# Altium PCB PCB1.PcbDoc
Units mil, origin at the board's own origin, x right, y up, seen from the top; angles counter-clockwise.
Board outline 1707.5 x 1259.84 mil, 4 copper layers (Top Layer, GND, Sign, Bottom Layer), stack 74.06 mil thick; 63 components, 58 nets, 299 pads, 627 vias.
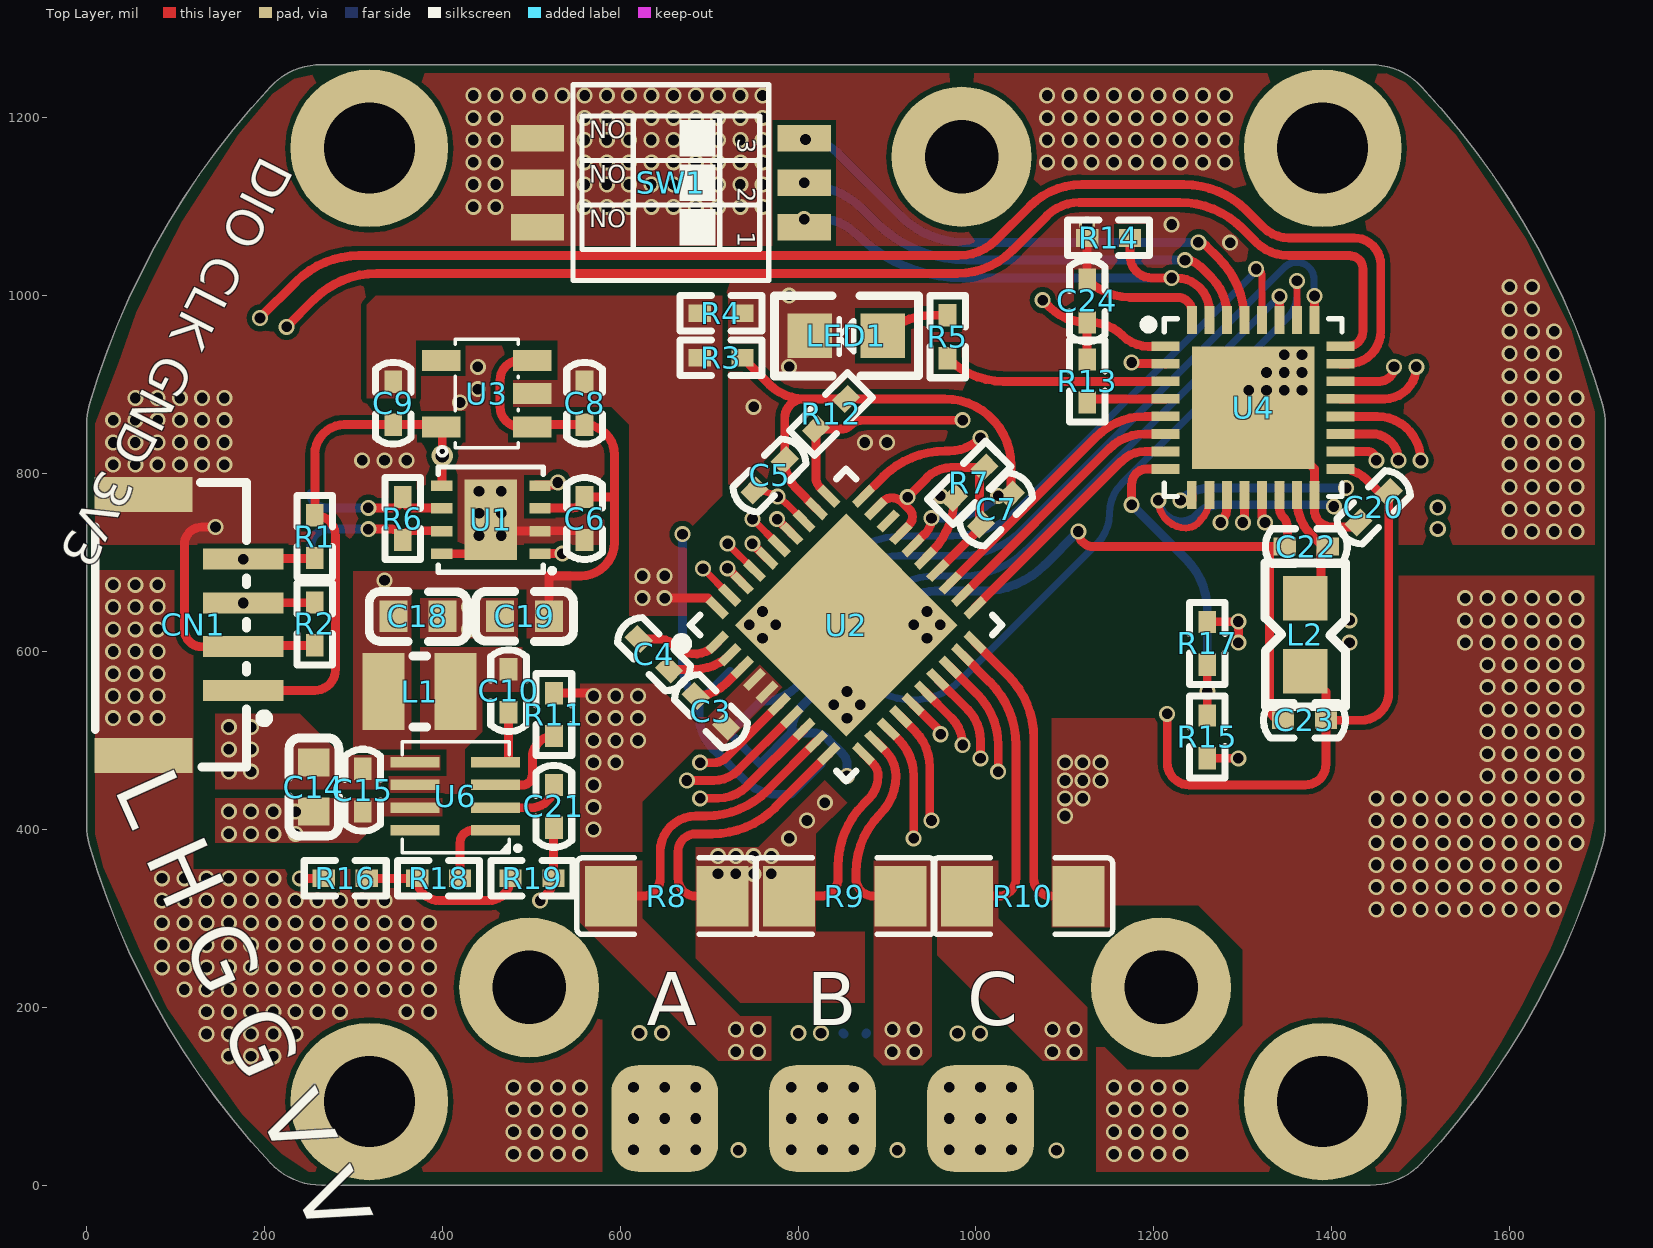
[diagram p0: Top Layer view]
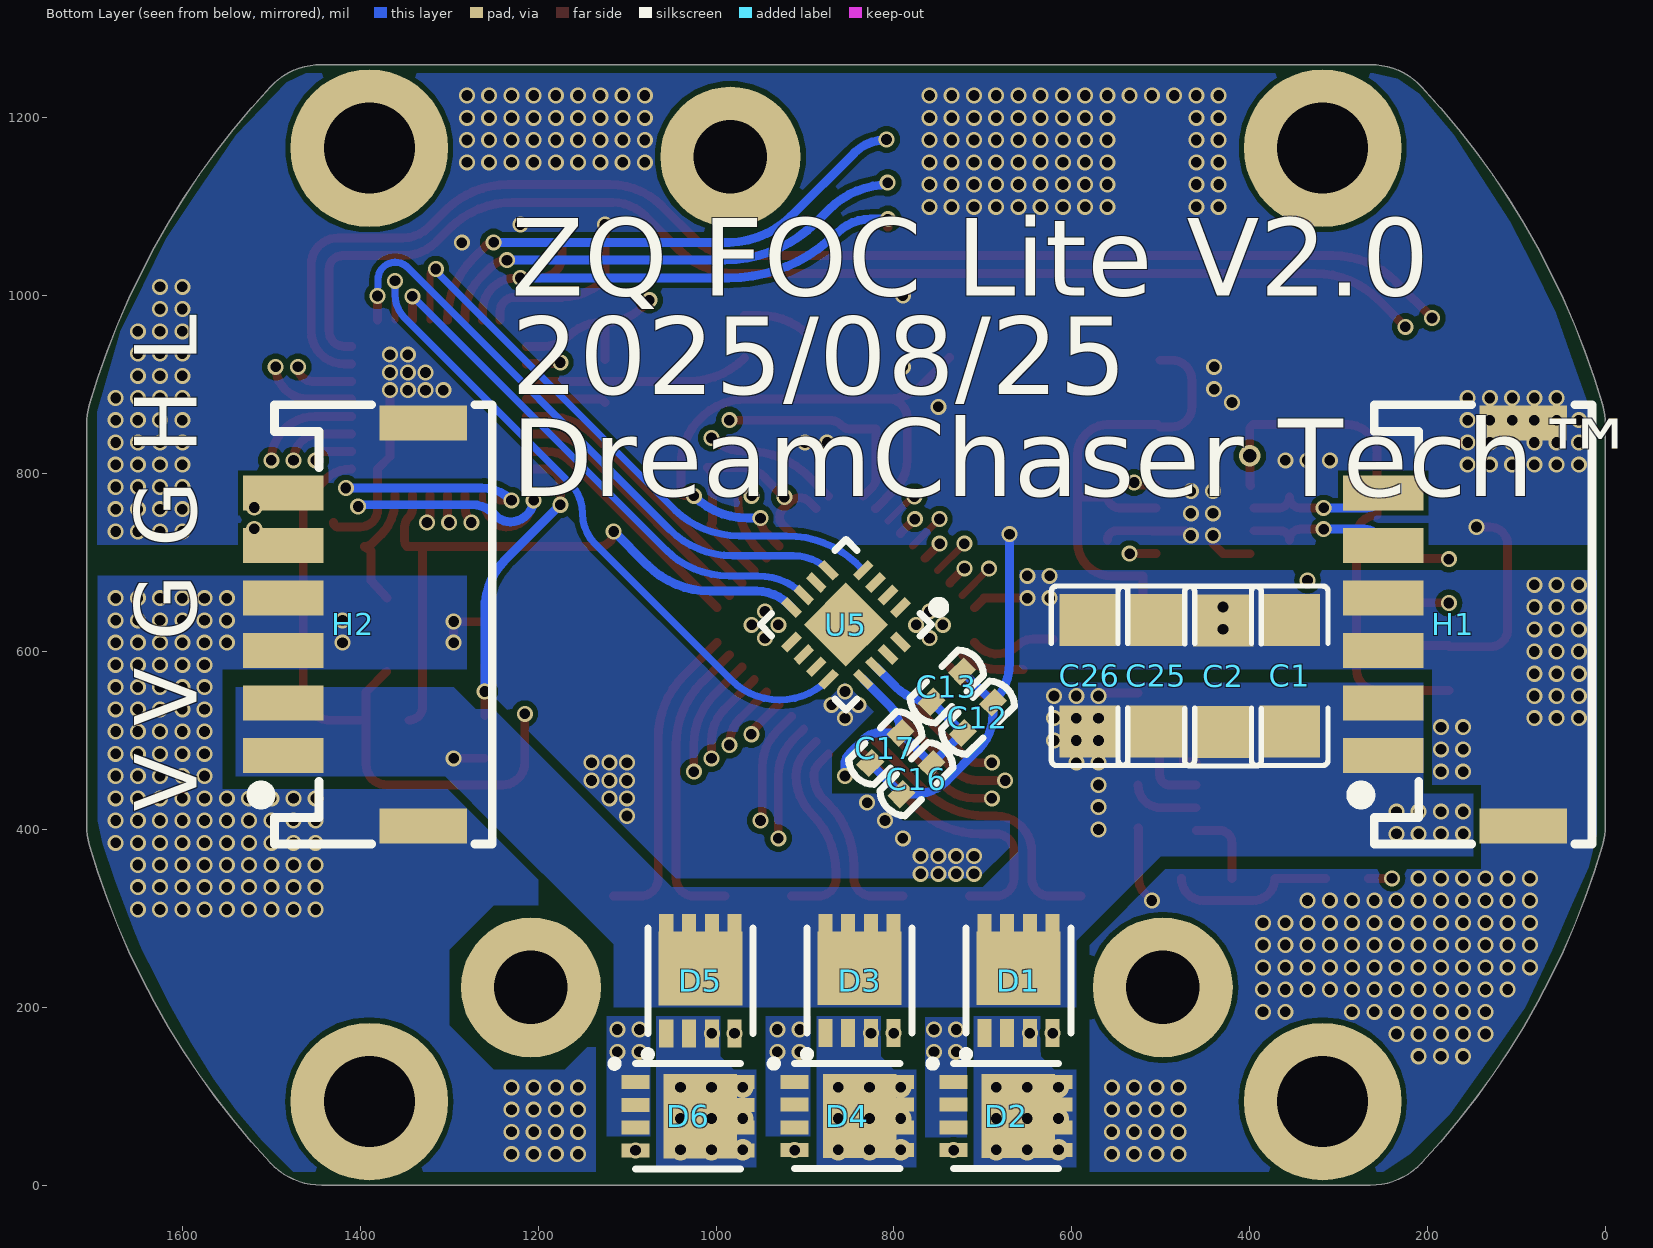
[diagram p1: Bottom Layer view, seen from below]
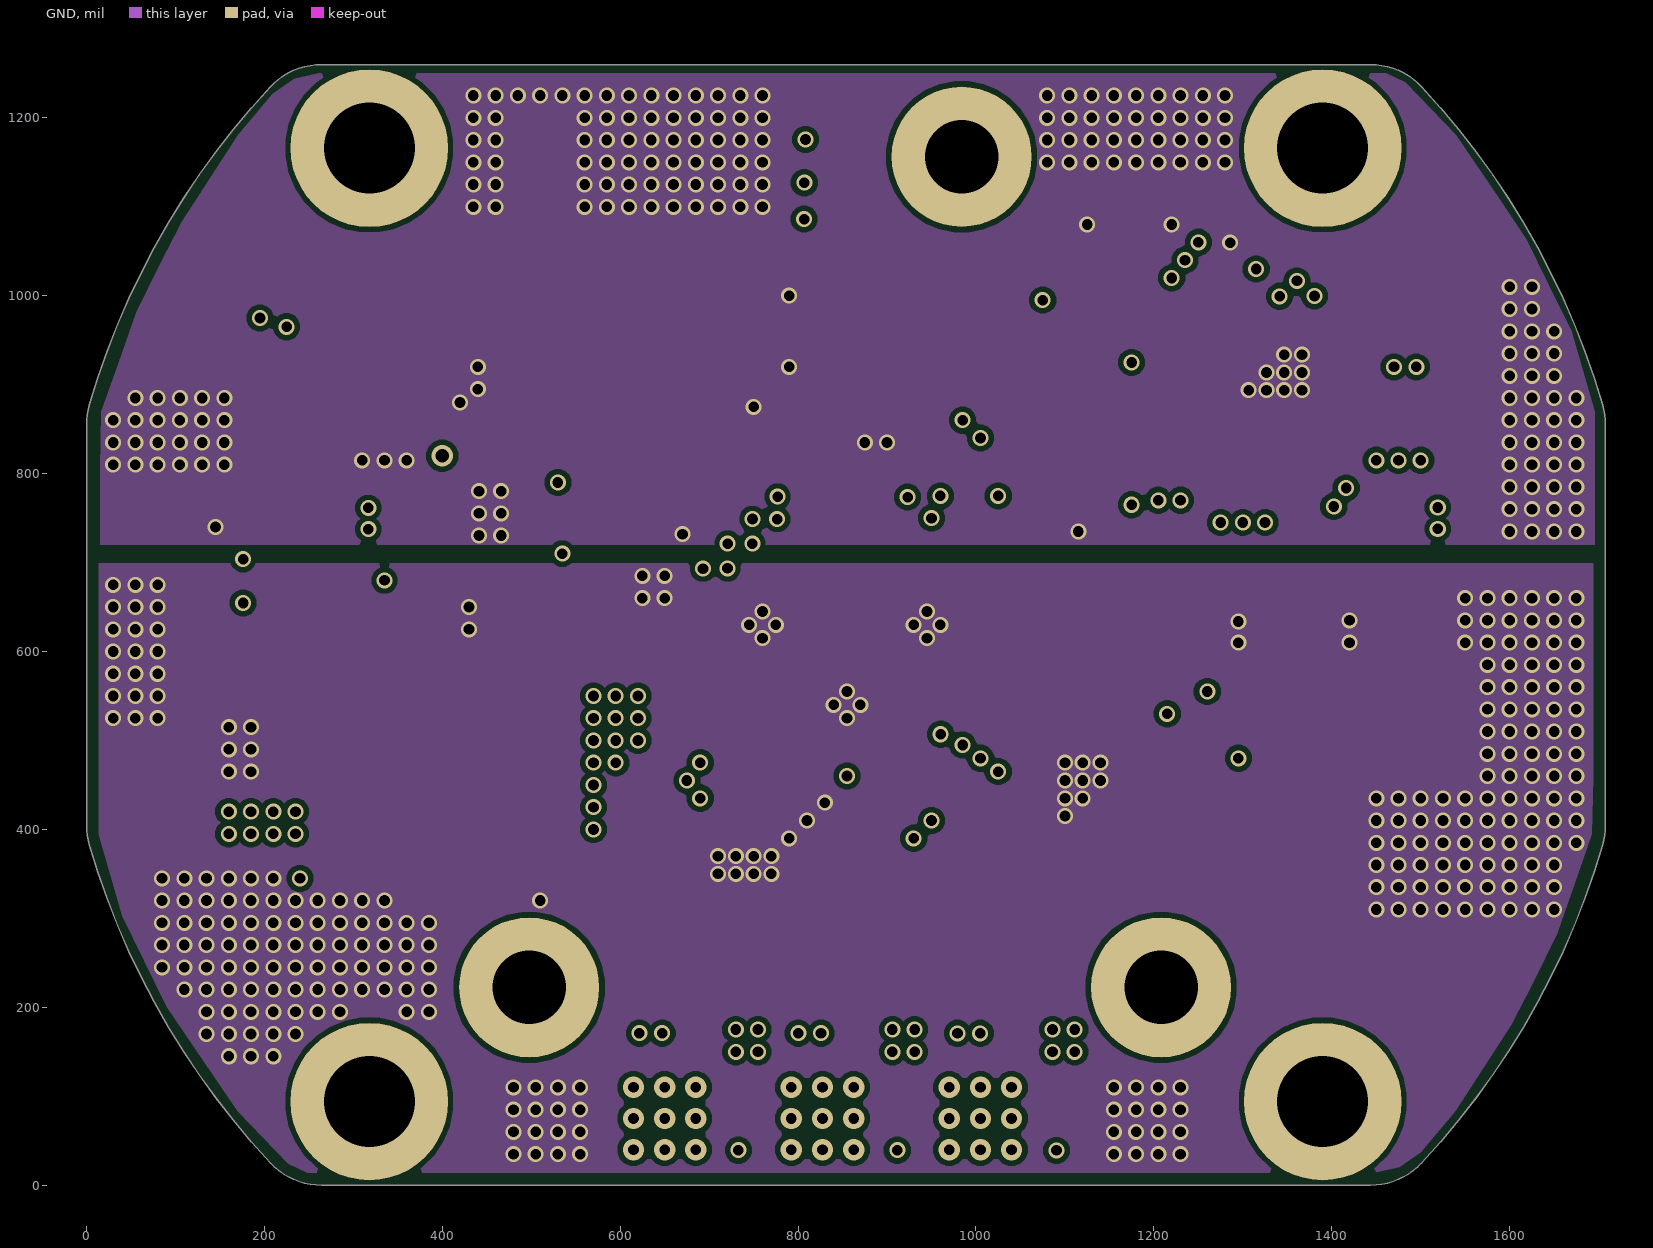
[diagram p2: GND]
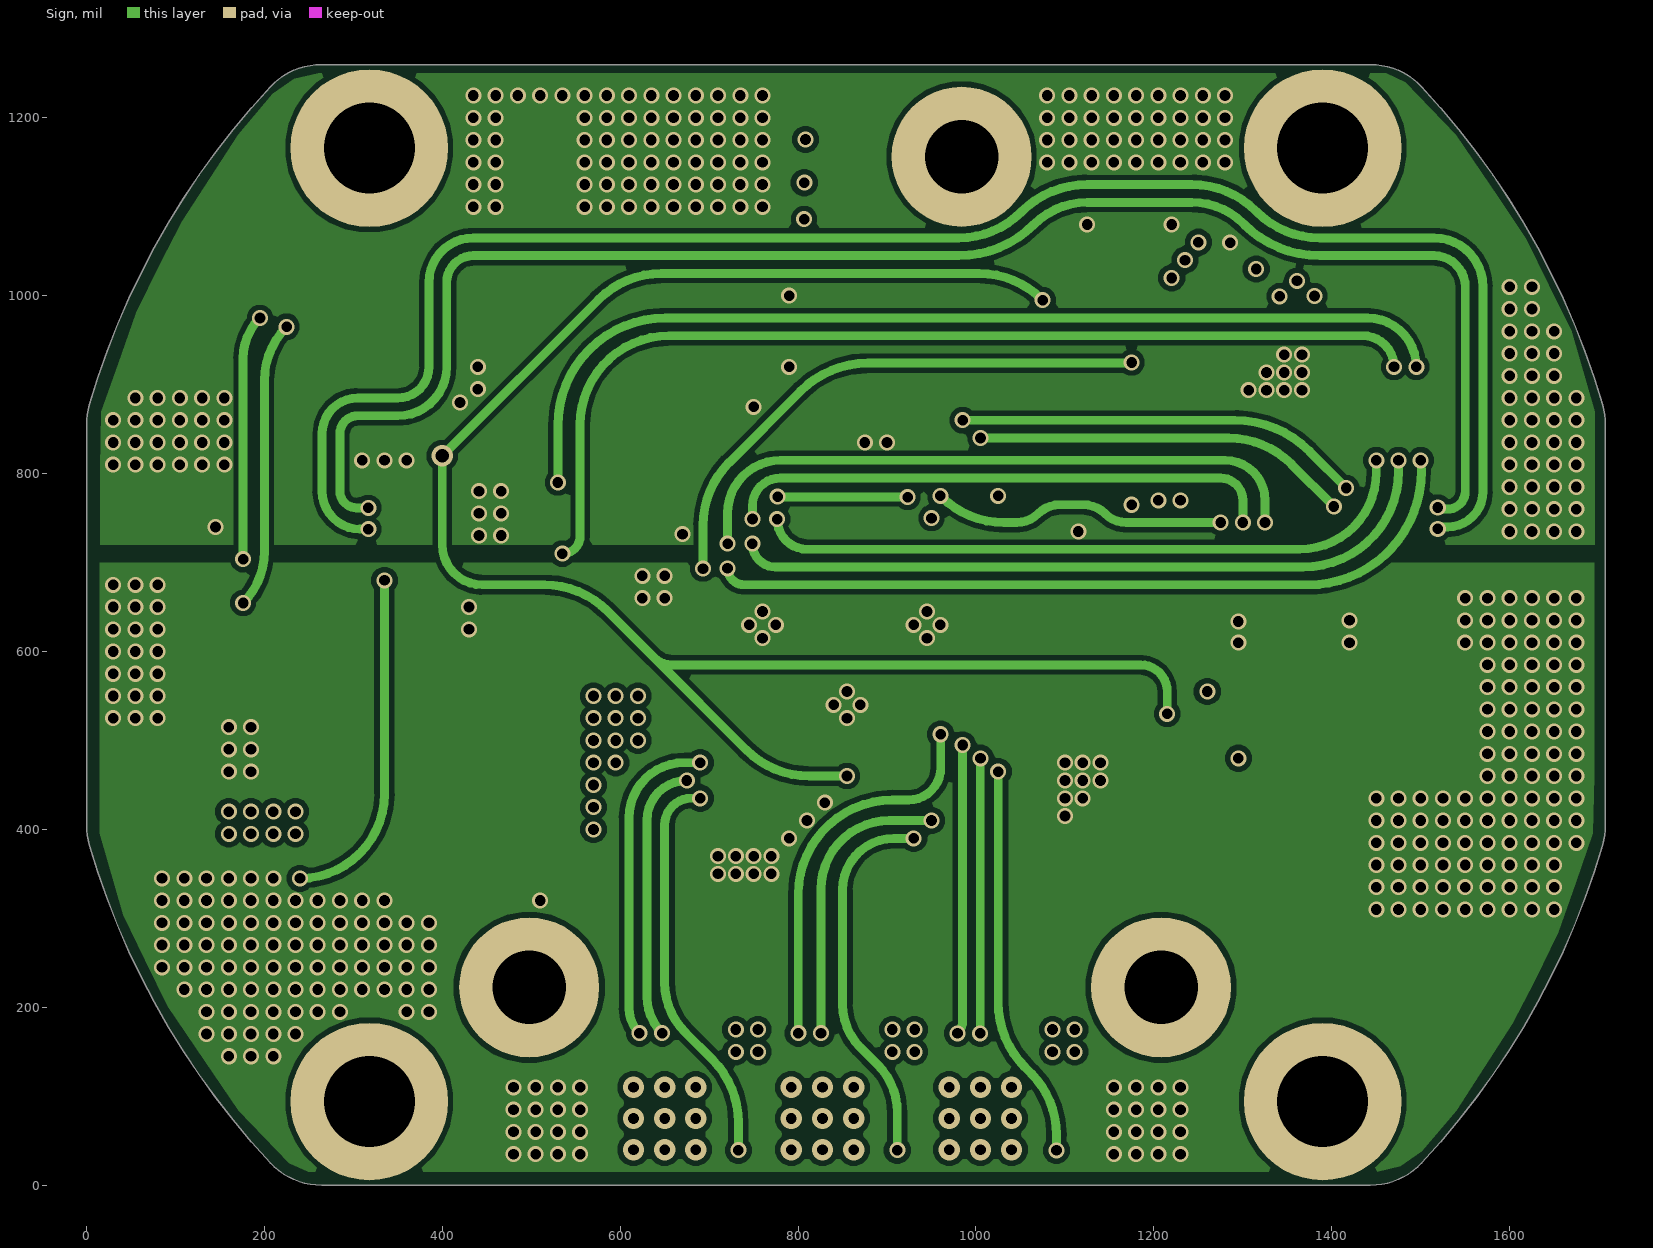
[diagram p3: Sign]
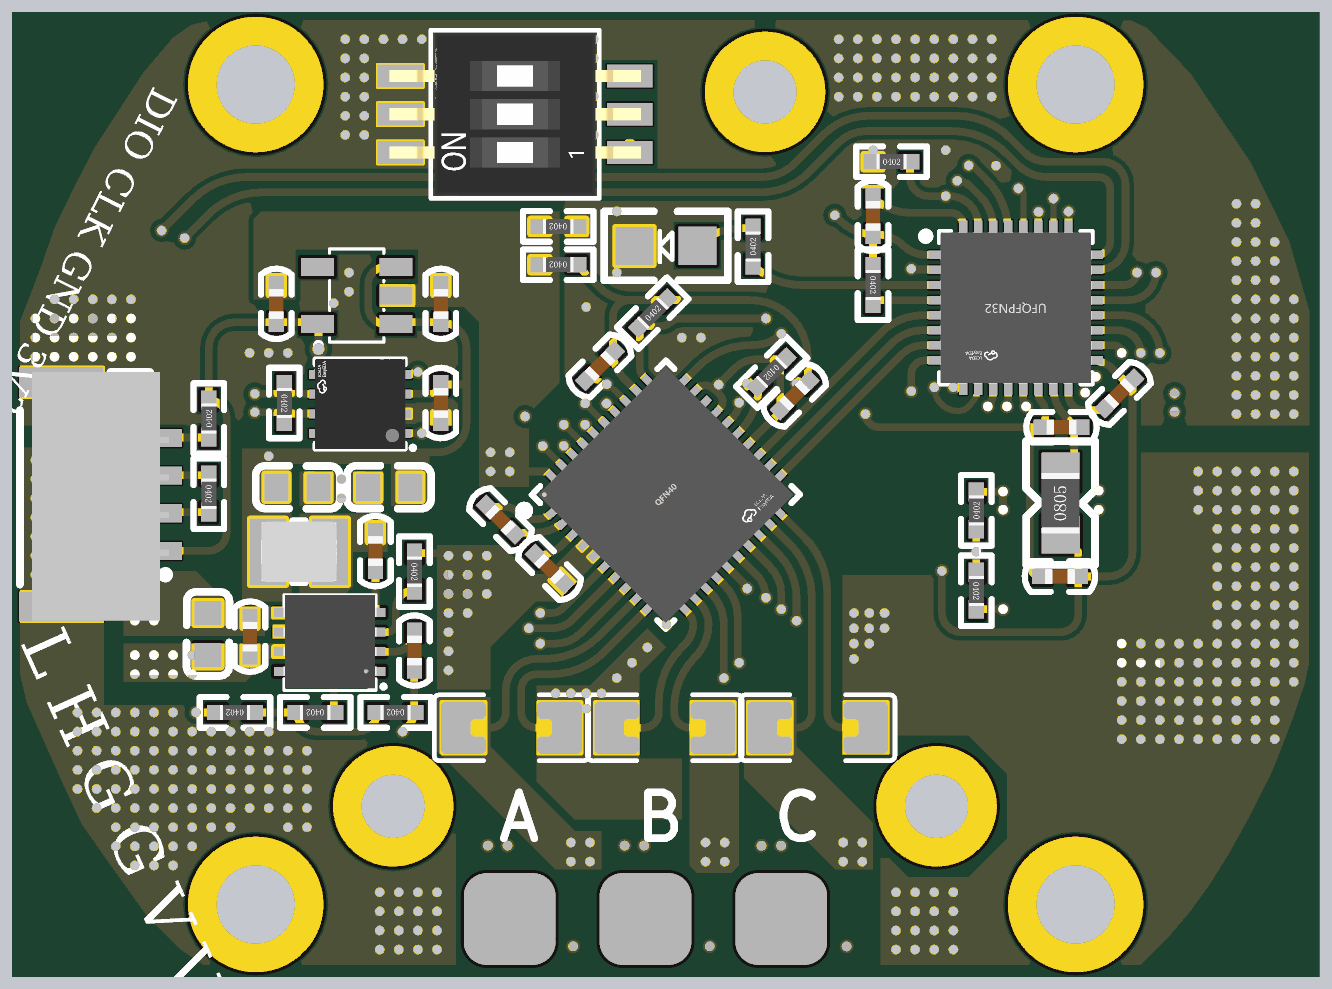
[diagram p4: 3D render of the assembled board from above, using the file's embedded part models]
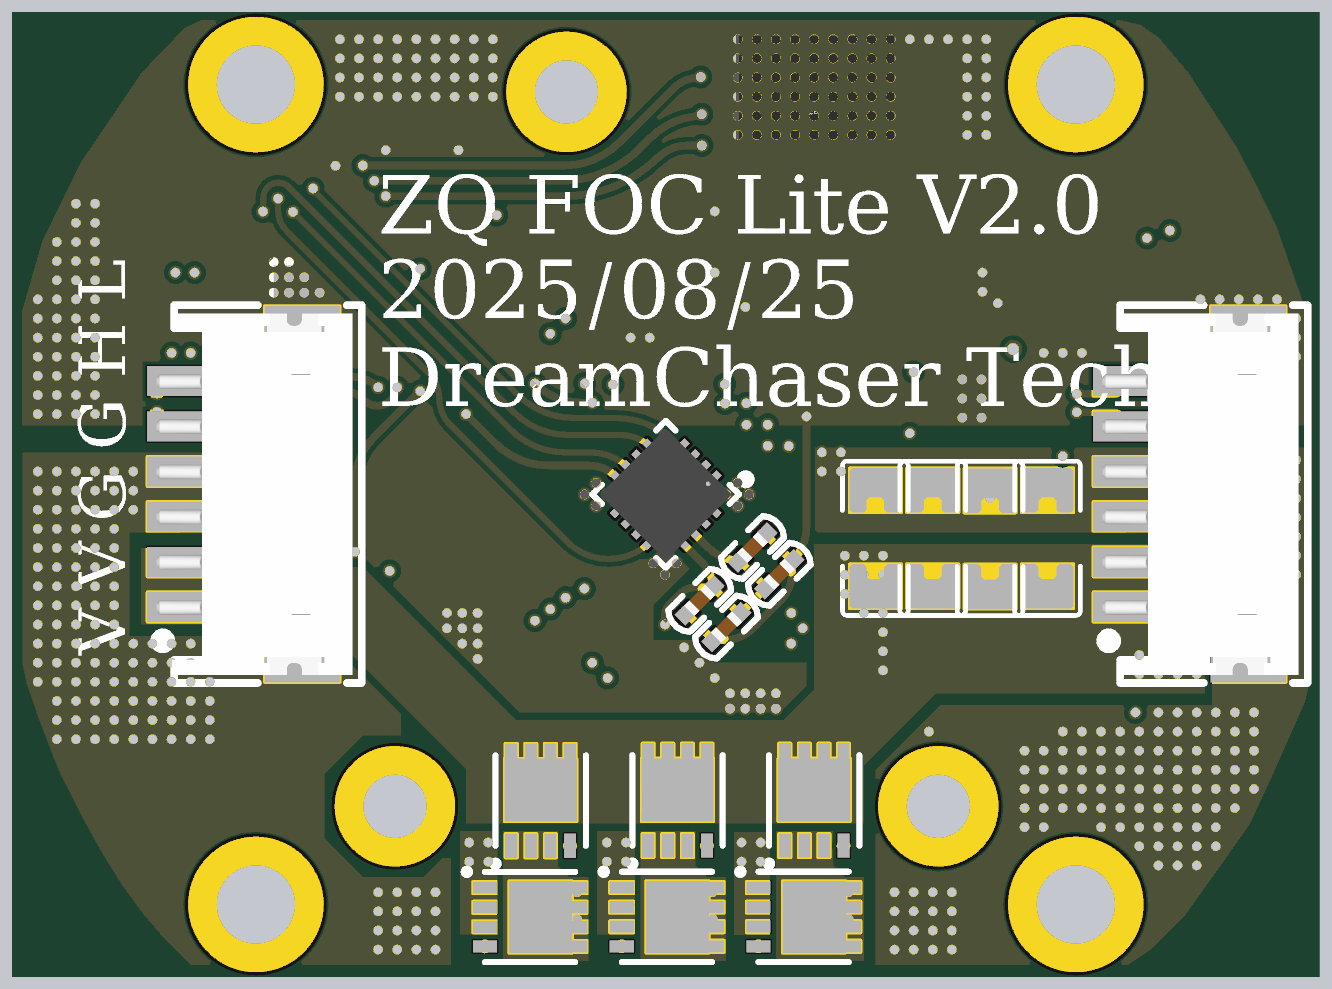
[diagram p5: 3D render of the assembled board from below, using the file's embedded part models]

## Layer stack, top to bottom
Top Solder: solder mask 0.4, Solder Resist, Dk 3.5
Top Layer: signal copper 1.4
Dielectric 2: prepreg 10.6299, PP-006, Dk 4.1
GND: signal copper 1.378
Dielectric 1: dielectric 47.244, FR-4, Dk 4.8
Sign: signal copper 1.378
Dielectric 3: prepreg 10.6299, PP-006, Dk 4.1
Bottom Layer: signal copper 1.4
Bottom Solder: solder mask 0.4, Solder Resist, Dk 3.5

## Board outline
206.79,24.97 cw(c853.88,629.92) 3.25,382.67 cw(c78.86,404.65) 0.12,404.65 0.13,855.2 cw(c78.87,855.2) 3.25,877.17 cw(c853.88,629.92) 206.79,1234.88 cw(c264.31,1181.1) 264.31,1259.84 1443.44,1259.84 cw(c1443.44,1181.1) 1500.96,1234.88 cw(c853.88,629.92) 1704.5,877.17 cw(c1628.89,855.2) 1707.62,855.2 1707.62,404.65 cw(c1628.89,404.65) 1704.5,382.67 cw(c853.88,629.92) 1500.96,24.97 cw(c1443.44,78.74) 1443.44,0 264.31,0 cw(c264.31,78.74)

## Design rules (kind name [scope] priority, off if disabled: settings)
Clearance [All] p1: gap=6 ignorepadtopadclearanceinfootprint=FALSE except(0: Arc-Hole Track-Hole SMDPad-Hole THPad-Hole Via-Hole Fill-Hole Poly-Hole Region-Hole Text-Hole)
DiffPairsRouting [All] p1: maxlimit=10 minlimit=10 mostfreqgap=10 toplayer_minwidth=8 toplayer_maxwidth=15 toplayer_prefwidth=10 midlayer1_minwidth=8 midlayer1_maxwidth=15 midlayer1_prefwidth=10 midlayer2_minwidth=8 midlayer2_maxwidth=15 midlayer2_prefwidth=10 bottomlayer_minwidth=8 bottomlayer_maxwidth=15 bottomlayer_prefwidth=10 maxuncoupledlength=500
HoleSize [All] p1: absolutevalues=TRUE maxlimit=10000 minlimit=1 maxpercent=80.000 minpercent=20.000
HoleToHoleClearance [All] p1: gap=0 allowstackedmicrovias=TRUE
MinimumSolderMaskSliver [All] p1: minsoldermaskwidth=0
PlaneClearance [All] p1: clearance=6
PlaneConnect [All] p1: planeconnectstyle=Direct reliefexpansion=20 reliefentries=4 reliefconductorwidth=10 reliefairgap=10
PolygonConnect [All] p1: connectstyle=Direct reliefconductorwidth=10 reliefentries=4 polygonreliefangle="90 Angle" airgapwidth=10
RoutingVias [All] p1: holewidth=12 width=18 viastyle="Through Hole" minholewidth=12 minwidth=18 maxholewidth=28 maxwidth=50
SilkToSilkClearance [All] p1: silktosilkclearance=0
SilkToSolderMaskClearance [IsPad] p1: minsilkscreentomaskgap=0 clearancetoexposedcopper=TRUE
SolderMaskExpansion [All] p1: expansion=4 istentingtop=FALSE
Width [All] p1: maxlimit=20 minlimit=6 preferedwidth=10
22 further rules are at their usual default settings.

## Classes and differential pairs
differential pair CAN: +CAN_P -CAN_N

## Components (designator, comment, footprint, x,y, rotation, side; value= is the part's Value field where it differs from the comment)
C1 "100uF" 1206 338.02,1163.63 r270 bottom
C2 "100uF" 1206 413.02,1163.23 r270 bottom
C3 "1uF" c0402 685,550 r315 top
C4 "47nF" c0402 620.92,614.08 r315 top
C5 "1uF" c0402 785,815 r225 top
C6 "0.1uF" c0402 560,725.41 r90 top
C7 "0.1uF" c0402 1039.58,776.72 r225 top
C8 "10uF" c0402 560,903.2 r270 top
C9 "10uF" c0402 345,903.2 r270 top
C10 "100nF" c0402 474.52,531.8 r90 top
C12 "1uF" C0402 722.57,508.57 r135 bottom
C13 "100nF" C0402 757.57,543.57 r135 bottom
C14 "10uF" C0603 167.57,1062.78 r270 top
C15 "100nF" c0402 310.52,468.2 r270 top
C16 "1uF" C0402 791.65,439.49 r135 bottom
C17 "100nF" C0402 826.65,474.49 r135 bottom
C18 "10uF" C0603 987.97,727.36 r180 top
C19 "10uF" C0603 -122.7,551.45 r0 top
C20 "0.1uF" c0402 1464.08,779.08 r225 top
C21 "100nF" c0402 525.52,401.8 r90 top
C22 "0.1uF" c0402 1347.23,717.99 r0 top
C23 "0.1uF" c0402 1345.2,522.7 r0 top
C24 "0.1uF" c0402 1125,970 r90 top
C25 "100uF" 1206 488.02,1163.63 r270 bottom
C26 "100uF" 1206 563.02,1163.63 r270 bottom
CN1 "卧式STLINK" CONN-SMD_4P-P1.25_GH1.25-4P 120,630 r270 top
D1 "NTMFS5C410NL" DFN-8_L3.0-W3.0-P0.65-BL 660,230 r180 bottom
D2 "NTMFS5C410NL" DFN-8_L3.0-W3.0-P0.65-BL 673.82,77.72 r270 bottom
D3 "NTMFS5C410NL" DFN-8_L3.0-W3.0-P0.65-BL 838.62,230 r180 bottom
D4 "NTMFS5C410NL" DFN-8_L3.0-W3.0-P0.65-BL 852.44,77.72 r270 bottom
D5 "NTMFS5C410NL" DFN-8_L3.0-W3.0-P0.65-BL 1017.56,229.84 r180 bottom
D6 "NTMFS5C410NL" DFN-8_L3.0-W3.0-P0.65-BL 1031.38,77.56 r270 bottom
H1 "卧式XH1.5 6PIN" CONN-SMD_6P-P1.50_ZX-ZH1.5-6PWT 155,630 r90 bottom
H2 "卧式XH1.5 6PIN" CONN-SMD_6P-P1.50_ZX-ZH1.5-6PWT 1391.54,630 r90 bottom
L1 "22uH" IND-SMD_L2.5-W2.0 374.52,555 r0 top value=10uH
L2 "10μH" L0805 1370.2,577.7 r90 top
LED1 "LED" led0805 895.43,955 r180 top
R1 "10KΩ" R0402 256.7,705.11 r90 top
R2 "10KΩ" R0402 256.7,655.11 r270 top
R3 "0Ω" R0402 737.62,930.31 r180 top
R4 "0Ω" R0402 737.62,980.31 r180 top
R5 "2KΩ" R0402 968.12,929.8 r90 top
R6 "120Ω" R0402 355.46,773.61 r270 top
R7 "10KΩ" R0402 1009.58,806.72 r225 top
R8 "30mR" 1206 1243.23,308.02 r180 top
R9 "30mR" 1206 261.77,341.98 r0 top
R10 "30mR" 1206 1643.63,308.02 r180 top
R11 "10KΩ" R0402 525.52,553.2 r270 top
R12 "200KΩ" R0402 820,850 r45 top
R13 "10KΩ" R0402 1125,928.2 r270 top
R14 "200KΩ" R0402 1125,1065 r0 top
R15 "10KΩ" R0402 1260,528.2 r270 top
R16 "43KΩ" R0402 315,345 r180 top
R17 "1KΩ" R0402 1260,585 r90 top
R18 "51KΩ" R0402 420,345 r180 top
R19 "8.2KΩ" R0402 525,345 r180 top
SW1 "DSHP03TSGER" SW-SMD_6P-L5.4-W5.4-P1.27-LS8.4 657,1127 r90 top
U1 "SIT1057QTK/3" DFN-8_L3.0-W3.0-P0.65-BL-EP 454.53,748.24 r90 top
U2 "DRV8323HRTAR" QFN-40_L6.0-W6.0-P0.50-BL-EP4.5 854.07,629.73 r315 top locked
U3 "XC6201P332MR-HXY" SOT-23-5_L3.0-W1.7-P0.95-LS2.8-BR 450,890 r0 top
U4 "STM32G431KBU3" UFQFPN-32_L5.0-W5.0-P0.50-BL-EP3.5 1311.58,874.21 r270 top
U5 "MA600" qfn-16-l3.0-w3.0-p0.50-tl-ep1.7 853.96,630.15 r315 bottom locked
U6 "MP9943" "QFN-8 3x3" 460.07,398.82 r180 top

## Footprints (in the part's own frame and the unit in brackets; to place one, negate y for a bottom-side part, rotate by r counter-clockwise, add the part's x,y. Pads: shape width x height; smd on the part's side, far side on the other; paste and mask are expansions set on the pad)
1206 [mm]
  rect 1.485x1.728 smd paste-100 mask+0.051: 1(13.417,-0.431) 2(16.602,-0.431)
  silkscreen extent 12.45,-1.52 17.57,0.66, body extent 13.41,-1.24 16.61,0.38, height 1.11
c0402 [mil]
  rect 25x20 smd: 1(0,0) 2(48.2,0)
  silkscreen extent -22,-20 70,20, body extent 5,-10 44,10, height 20
C0402 [mil]
  rect 25x20 smd: 1(0,0) 2(48.2,0)
  silkscreen extent -22,-20 70,20, body extent 5,-10 44,10, height 20
C0603 [mm]
  rect 0.8x0.9 smd: 1(14.93,2.234) 2(16.33,2.234)
  silkscreen extent 14.22,1.52 17.02,2.95, body extent 14.82,1.84 16.42,2.64, height 0.78
CONN-SMD_4P-P1.25_GH1.25-4P [mm]
  rect 0.6x2.3 smd mask+0.051: 1(1.875,1.425) 2(0.625,1.425) 3(-0.625,1.425) 4(-1.875,1.425)
  rect 1x2.8 smd mask+0.051: 5(-3.725,-1.425) 6(3.725,-1.425)
  silkscreen extent -4.06,-2.8 4.06,2.16, body extent -4.07,-2.4 4.19,2.15, height 4.13
CONN-SMD_6P-P1.50_ZX-ZH1.5-6PWT [mm]
  rect 1x2.3 smd paste+0 mask+0.05: 1(-3.738,2.413) 2(-2.238,2.413) 3(-0.738,2.413) 4(0.762,2.413) 5(2.262,2.413) 6(3.762,2.413)
  rect 1x2.5 smd paste+0 mask+0.05: 7(5.762,-1.587) 8(-5.738,-1.587)
  silkscreen extent -6.26,-3.56 6.28,3.46, body extent -6,-3.25 6.01,3.25, height 3.78
DFN-8_L3.0-W3.0-P0.65-BL [mm]
  rect 0.4x0.8 smd paste-100 mask+0.051: D(-0.975,1.5) D(-0.325,1.5) D(0.325,1.5) D(0.975,1.5) G(0.975,-1.5) S(-0.975,-1.5) S(-0.325,-1.5) S(0.325,-1.5)
  rect 2.4x2.1 smd paste-100 mask+0.051: D(0,0.35)
  silkscreen extent -1.6,-2.2 1.5,1.5, body extent -1.55,-1.6 1.55,1.6, height 0.8
DFN-8_L3.0-W3.0-P0.65-BL-EP [mm]
  rect 0.3x0.6 smd paste+0 mask+0.05: 1(-0.975,-1.4) 2(-0.325,-1.4) 3(0.325,-1.4) 4(0.975,-1.4) 5(0.975,1.4) 6(0.325,1.4) 7(-0.325,1.4) 8(-0.975,1.4)
  rect 2.3x1.5 smd paste+0 mask+0.05: 9(0,0)
  silkscreen extent -1.51,-1.8 1.5,1.5, body extent -1.5,-1.5 1.5,1.5, height 1.01
IND-SMD_L2.5-W2.0 [mm]
  rect 1.2x2.2 smd: 1(1.028,0) 2(-1.028,0)
  silkscreen extent -0.2,-1.02 0.2,1.02, body extent -1.26,-1 1.26,1, height 1.2
L0805 [mil]
  rect 50x50 smd: 1(0,0) 2(82.3,0.2)
  silkscreen extent -40,-45 122,45, body extent 1,-24 80,25, height 22
led0805 [mil] "1/8W"
  rect 50x50 smd: 1(0,0) 2(82.3,0.2)
  silkscreen extent -40,-45 122,45, body extent 2,-25 80,25, height 20
"QFN-8 3x3" [mm]
  rect 1.4x0.3 smd: 1(0,0) 2(0,-0.65) 3(0,-1.3) 4(0,-1.95) 5(2.3,-1.95) 6(2.3,-1.3) 7(2.3,-0.65) 8(2.3,0)
  silkscreen extent -0.64,-2.54 2.67,0.64, body extent -0.41,-2.53 2.69,0.57, height 0.94
qfn-16-l3.0-w3.0-p0.50-tl-ep1.7 [mm]
  rect 0.6x0.25 smd: 1(-1.45,0.75) 2(-1.45,0.25) 3(-1.45,-0.25) 4(-1.45,-0.75) 9(1.45,-0.75) 10(1.45,-0.25) 11(1.45,0.25) 12(1.45,0.75)
  rect 0.25x0.6 smd: 5(-0.75,-1.45) 6(-0.25,-1.45) 7(0.25,-1.45) 8(0.75,-1.45) 13(0.75,1.45) 14(0.25,1.45) 15(-0.25,1.45) 16(-0.75,1.45)
  rect 1.7x1.7 smd: 17(0,0)
  silkscreen extent -2.38,-1.72 1.72,1.72, body extent -1.55,-1.55 1.55,1.55, height 0.94
QFN-40_L6.0-W6.0-P0.50-BL-EP4.5 [mm]
  rect 0.25x0.7 smd paste-100 mask+0.051: 1(-2.25,-2.95) 2(-1.75,-2.95) 3(-1.25,-2.95) 4(-0.75,-2.95) 5(-0.25,-2.95) 6(0.25,-2.95) 7(0.75,-2.95) 8(1.25,-2.95) 9(1.75,-2.95) 10(2.25,-2.95) 21(2.25,2.95) 22(1.75,2.95) 23(1.25,2.95) 24(0.75,2.95) 25(0.25,2.95) 26(-0.25,2.95) 27(-0.75,2.95) 28(-1.25,2.95) 29(-1.75,2.95) 30(-2.25,2.95)
  rect 0.7x0.25 smd paste-100 mask+0.051: 11(2.95,-2.25) 12(2.95,-1.75) 13(2.95,-1.25) 14(2.95,-0.75) 15(2.95,-0.25) 16(2.95,0.25) 17(2.95,0.75) 18(2.95,1.25) 19(2.95,1.75) 20(2.95,2.25) 31(-2.95,2.25) 32(-2.95,1.75) 33(-2.95,1.25) 34(-2.95,0.75) 35(-2.95,0.25) 36(-2.95,-0.25) 37(-2.95,-0.75) 38(-2.95,-1.25) 39(-2.95,-1.75) 40(-2.95,-2.25)
  rect 4.5x4.5 smd paste-100 mask+0.051: 41(0,0)
  silkscreen extent -3.15,-3.85 3.15,3.15, body extent -3.01,-3.01 3.01,3.01, height 0.83
R0402 [mil] "1/16W"
  rect 25x20 smd: 1(0,0) 2(48.2,0)
  silkscreen extent -22,-20 70,20, body extent 5,-10 44,10, height 14
SOT-23-5_L3.0-W1.7-P0.95-LS2.8-BR [mm]
  rect 1.1x0.6 smd: 1(1.3,-0.95) 2(1.3,0) 3(1.3,0.95) 4(-1.3,0.95) 5(-1.3,-0.95)
  silkscreen extent -1.4,-1.78 0.9,1.55, body extent -1.5,-1.5 1.5,1.5, height 1.3
SW-SMD_6P-L5.4-W5.4-P1.27-LS8.4 [mil]
  rect 30x60 smd paste+0 mask+2: 1(-50,-150) 2(0,-150) 3(50,-150) 4(50,150) 5(0,150) 6(-50,150)
  silkscreen extent -110,-110 110,110, body extent -106,-164 106,164, height 91
UFQFPN-32_L5.0-W5.0-P0.50-BL-EP3.5 [mm]
  rect 0.28x0.8 smd paste-100 mask+0.051: 1(-1.75,-2.5) 2(-1.25,-2.5) 3(-0.75,-2.5) 4(-0.25,-2.5) 5(0.25,-2.5) 6(0.75,-2.5) 7(1.25,-2.5) 8(1.75,-2.5) 17(1.75,2.5) 18(1.25,2.5) 19(0.75,2.5) 20(0.25,2.5) 21(-0.25,2.5) 22(-0.75,2.5) 23(-1.25,2.5) 24(-1.75,2.5)
  rect 0.8x0.28 smd paste-100 mask+0.051: 9(2.5,-1.75) 10(2.5,-1.25) 11(2.5,-0.75) 12(2.5,-0.25) 13(2.5,0.25) 14(2.5,0.75) 15(2.5,1.25) 16(2.5,1.75) 25(-2.5,1.75) 26(-2.5,1.25) 27(-2.5,0.75) 28(-2.5,0.25) 29(-2.5,-0.25) 30(-2.5,-0.75) 31(-2.5,-1.25) 32(-2.5,-1.75)
  rect 3.5x3.5 smd paste-100 mask+0.051: 33(0,0)
  silkscreen extent -2.54,-3.12 2.54,2.54, body extent -2.51,-2.52 2.52,2.51, height 0.61

## Part data
C1 C2 C14 C18 C19 C25 C26: library part 1210贴片电容, "1210贴片电容"
C3 C4 C5 C6 C7 C8 C9 C10 C12 C13 C15 C16 C17 C20 C21 C22 C23 C24: library part 0402贴片电容, "贴片电容0402"
D1 D2 D3 D4 D5 D6: "N沟道MOS管", ComponentLink1Description="Manufacturer Link", ComponentLink1URL=http://www.irf.com/, DatasheetVersion=PD-9.814, LatestRevisionDate=17-Jul-2002, LatestRevisionNote="Re-released for DXP Platform.", Note="Pin 2 is electrically connected to pin 4.", PackageDescription="TO, Thru-Hole, Vertical, Heatsink Mounted; 3 In-Line Leads; Pitch 2.54 mm", PackageReference=TO-220AB, PackageVersion=Feb-1997, Published=8-Jun-2000, Publisher="Altium Limited"
L1: library part 0530屏蔽电感, "一体成型屏蔽电感，0530封装，额定电流3A", DC Resistance (DCR)=125mΩ, JLCPCB Part Class="Extended Part", LCSC Part Name="10uH ±20% 3.5A", Manufacturer=XR(祥如), Manufacturer Part=XR0530-100M, Rated Current=3.2A, Saturation Current (Isat)=3.5A, Tolerance=±20%, Add into BOM=yes, Convert to PCB=yes, Datasheet=https://atta.szlcsc.com/upload/public/pdf/source/20240328/42FE63A3232C4AF7EB8F1CDEDD5FC69F.pdf, Device=XR0530-100M, Supplier=LCSC, Supplier Footprint=SMD,0530, Supplier Part=C5307602, Symbol=XR0530-100M, Type=一体成型电感
L2: library part 0805贴片电感, "0805贴片电感"
LED1: library part 0805贴片LED, "0805贴片LED"
R1 R2 R3 R4 R5 R6 R7 R11 R12 R13 R14 R15 R16 R17 R18 R19: library part 0402贴片电阻, "0402贴片电阻"
R8 R9 R10: library part 2512检流电阻, "2512检流电阻"
U2: JLCPCB Part Class="Extended Part", LCSC Part Name="5mA 无刷直流BLDC电机驱动芯片 60V", Manufacturer=TI(德州仪器), Add into BOM=yes, Convert to PCB=yes, Datasheet=https://www.ti.com/cn/lit/gpn/drv8323, Device=DRV8323HRTAR, Manufacturer Part=DRV8323HRTAR, Supplier=LCSC, Supplier Footprint=QFN-40-EP(6x6), Supplier Part=C701783, Symbol=DRV8323HRTAR
U3: "3.3V LDO", JLCPCB Part Class="Extended Part", Manufacturer="HXY MOSFET(华轩阳电子)", MAX Output Current=300mA, Maximum Input Voltage=12V, Output Voltage=3.3V, Add into BOM=yes, Convert to PCB=yes, Datasheet=https://atta.szlcsc.com/upload/public/pdf/source/20231208/3D7EFECB06481ED5AED4680614D7FFF5.pdf, Device=XC6201P332MR-HXY, LCSC Part Name=XC6201P332MR-HXY, Manufacturer Part=XC6201P332MR-HXY, Output Polarity=正极, Output Type=固定, Supplier=LCSC, Supplier Footprint=SOT-23-5L, Supplier Part=C19626990, Symbol=XC6201P332MR-HXY
U4: JLCPCB Part Class="Extended Part", LCSC Part Name="带DSP和FPU的170MHz主流ARM Cortex-M4 MCU，具有128 KB Flash存储器、数学加速器和中等模拟电平集成", Low Voltage Detection Threshold=1.71V~3.6V, Manufacturer=ST(意法半导体), ADC (Bit)=12bit, Add into BOM=yes, Application Area=-, Convert to PCB=yes, CPU Core=ARM-M4, CPU Maximum Speed=170MHz, DAC (Bit)=12bit, Datasheet=https://atta.szlcsc.com/upload/public/pdf/source/20210607/F3CD0646E5D00AAFDE875C196C2D7333.pdf, Device=STM32G431KBU3, Manufacturer Part=STM32G431KBU3, Number of I/O=26, Program Memory Type=FLASH, Program Storage Size=128KB, Supplier=LCSC, Supplier Footprint=UFQFPN-32(5x5), Supplier Part=C1341901, Symbol=STM32G431KBU3
U5: "磁编码器"

## Free pads (board coordinates)
  round 157.48 hole 82.68: 7(497.73,222.37) 8(1208.03,222.37) 9(983.84,1156.18)
  round 177.17 hole 102.36: 10(317.98,1165.82) 11(1389.77,1165.82) 12(317.98,94.02) 13(1389.77,94.02)
  rrect50% 120x120 smd: 14(650,75) 14(827.5,75) 14(1005,75)

## Via types
v1: diameter 18, hole 12, Top Layer to Bottom Layer, tented both sides, 599 vias
v2: diameter 24, hole 12, Top Layer to Bottom Layer, tented both sides, 27 vias
v3: diameter 24, hole 15, Top Layer to Bottom Layer, tented both sides, 1 vias

## Nets (pads, with @x,y where several pads share a name; then routed paths per layer and width w, separated by ;. In a path a pad name is that pad's centre, name@x,y a point inside that pad or via, vN(x,y) a via of type N, cw(c..) or ccw(c..) an arc to the next point about the centre after c; other vN are vias at no path point)
3V3: C9.2 C12.1 C13.1 C16.2 C17.2 C20.1 C23.2 C24.1 CN1.1 L2.1 R1.2 R13.1 U1.5 U3.5 U4.1 U4.17 U5.13 U5.14 | length 3992.2
  Top Layer w10: CN1.1 256.18,556.18 ccw(c256.18,580) 280,580 280,730.02 ccw(c256.7,730.02) R1.2 256.7,821.7 cw(c290,821.7) 290,855 396.42,855 400,851.42 v3(400,820) 399.71,819.71 399.71,787.24 U1.5@399.09,786.63 ; v1(1075,995) 1082.32,987.68 ccw(c1125,1030.36) C24.1 ; R13.1 C24.1 ; U4.1 1193.68,943.12 cw(c1193.68,983.68) 1165,955 ccw(c1128.79,918.79) 1128.79,970 C24.1 ; v1(1215,530) 1215,475 ccw(c1240,475) 1240,450 1370,450 ccw(c1370,473.4) 1393.4,473.4 C23.2 ; L2.1 1393.4,554.5 C23.2 ; U4.17 cw(c1410,763.97) 1439.24,793.21 1458.46,773.99 C20.1@1463.56,779.08 ; C20.1@1463.82,779.34 C20.1@1463.56,779.08 ; C23.2 1432.7,522.7 ccw(c1432.7,554.08) 1464.08,554.08 C20.1 C20.1@1463.56,779.08
  Sign w10: v1(855,460) 812.56,460 cw(c812.56,560) 741.85,489.29 638.09,593.05 ; v1(1075,995) 1074.29,995.71 ccw(c1003.58,925) 1003.58,1025 646.42,1025 ccw(c646.42,925) 575.71,995.71 v3(400,820) 400,720 ccw(c445,720) 445,675 514.72,675 cw(c514.72,575) 585.43,645.71 638.07,593.07 ; v1(1215,530) 1215,555 ccw(c1185,555) 1185,585 657.55,585 cw(c657.55,612.55) 638.09,593.05
  Bottom Layer w10: U5.14 798.08,560.35 cw(c757.57,600.87) C13.1 C12.1 C16.2 C17.2 ; U5.13 805.6,540.02 ccw(c837.05,508.57) C17.2 ; v1(855,460) 855,472.93 ccw(c837.93,472.93) 850,485 833.54,501.46 ccw(c816.38,484.3) 816.38,508.57 C17.2
5V: C6.2 C8.2 C18.2 C19.2 L1.2 R16.2 U1.3 U3.1 U3.3 | length 990
  Top Layer w10: v1(240,345) R16.2 ; U3.3 487.4,927.4 ccw(c487.4,905) 465,905 465,875 ccw(c487.4,875) 487.4,852.6 U3.1 503.59,855 C8.2 cw(c560,821.52) 593.48,821.52 593.48,775.21 593.45,773.45 ccw(c603.45,773.26) 593.48,772.43 593.48,722.62 cw(c555.86,722.62) 555.86,685 520,685 520,639.6 C19.2 ; U1.3@505.58,761.41 546.41,761.41 ccw(c546.41,775) C6.2@560,775 ; C6.2 591.94,773.61
  Sign w10: v1(240,345) ccw(c240,440) 335,440 v1(335,680)
AGND: C5.1 C7.1 R3.1 R12.2 U2.26 U2.32 | length 678.1
  Top Layer w10: R3.1 767.59,900.35 ccw(c806.86,939.61) 806.86,884.08 ; U2.32 798.26,782.98 cw(c830.28,815) C5.1 785,862.23 cw(c806.86,862.23) 806.86,884.08 ; U2.26 942.63,732.2 ccw(c924.83,750) v1(950,750) ; v1(1025,775) 1031.48,775 ccw(c1031.48,790.4) C7.1@1039.58,777.3 ; C7.1 C7.1@1039.58,777.3 ; 806.86,884.08 R12.2 964.5,884.08 cw(c964.5,809) 1039.58,809 C7.1@1039.58,777.3
  Bottom Layer w10: v1(950,750) 964.64,750 ccw(c964.64,835.36) v1(1025,775)
CAN_N: H1.6 H2.6 R6.1 U1.6 | length 2021.4
  Top Layer w10: v1(316.84,761.51) 343.37,761.51 ccw(c343.37,773.61) R6.1 ccw(c367.67,773.61) 367.67,761.41 U1.6@395.35,761.41
  Sign w10: v1@318.36,760 cw(c318.36,761.51) v1(316.84,761.51) 303.49,761.51 cw(c303.49,780) 285,780 285,845 cw(c305,845) 305,865 350,865 ccw(c350,920) 405,920 405,1015 cw(c435,1015) 435,1045 980.5,1045 ccw(c980.5,1164.5) 1065,1080 cw(c1125.36,1019.64) 1125.36,1105 1242.57,1105 cw(c1242.57,1022.57) 1300.86,1080.86 1301.57,1080.15 ccw(c1386.42,1165) 1386.42,1045 1515,1045 cw(c1515,1010) 1550,1010 1550,780 cw(c1530,780) 1530,760 1521.12,760 cw(c1521.12,762) v1(1519.12,762)
  Bottom Layer w10: H1.6@252.36,777.64 ccw(c268.48,777.64) 268.48,761.51 v1(316.84,761.51)
CAN_P: H1.5 H2.5 R6.2 U1.7 | length 2151.4
  Top Layer w10: v1(316.84,737.51) 343.37,737.51 cw(c343.37,725.41) R6.2 cw(c365.87,725.41) 365.87,735.82 U1.7@395.35,735.82
  Sign w10: v1@319.33,740 ccw(c319.33,737.51) v1(316.84,737.51) 307.49,737.51 cw(c307.49,780) 265,780 265,845 cw(c305,845) 305,885 350,885 ccw(c350,920) 385,920 385,1015 cw(c435,1015) 435,1065 980.5,1065 ccw(c980.5,1164.5) 1050.86,1094.14 cw(c1125.36,1019.64) 1125.36,1125 1242.57,1125 cw(c1242.57,1022.57) 1315,1095 ; 1315,1095 1315.71,1094.29 ccw(c1386.42,1165) 1386.42,1065 1515,1065 cw(c1515,1010) 1570,1010 1570,780 cw(c1530,780) 1530,740 1521.12,740 ccw(c1521.12,738) v1(1519.12,738)
  Bottom Layer w10: H1.5@252.36,718.58 cw(c271.3,718.58) 271.3,737.51 v1(316.84,737.51)
DGND: C6.1 C12.2 C13.2 C16.1 C17.1 C20.2 C22.1 C23.1 C24.2 CN1.2 CN1.5 H1.7 H2.7 LED1.2 R2.2 R4.1 R14.1 SW1.4 SW1.5 SW1.6 U1.2 U1.8 U1.9 U4.14 U4.16 U4.32 U4.33 U5.8 | length 2059.9
  Top Layer w10: v1(145,740) 130,740 ccw(c130,720) 110,720 110,625 ccw(c129.61,625) 129.61,605.39 CN1.2 cw(c177.62,605.39) 177.62,606.91 R2.2 ; U1.8 430,709.86 441.28,721.13 v1(441.28,730.33) ; v1(466.28,730.33) 471.39,735.45 U1.2 ; U1.2@505.58,735.82 549.59,735.82 cw(c549.59,725.41) C6.1 ; v1(1115,735) ccw(c1132.01,735) 1132.01,717.99 1330,717.99 ; C24.2 R14.1 v1(1125,1080) ; C24.2 ccw(c1173.28,1066.48) 1173.28,998.2 1226.8,998.2 cw(c1226.8,982.32) 1242.68,982.32 U4.32 ; U4.14@1341.1,761.89 U4.14 ; U4.14@1341.1,761.89 ccw(c1357.22,761.82) 1345.81,750.44 cw(c1335.74,740.34) 1350,740.34 1350,724.69 cw(c1340.54,724.69) C22.1 1330,717.99 ; C23.1 cw(c1345.2,537.9) 1330,537.9 1330,717.99 ; v1(1366.53,893.76) 1366.53,819.25 1380.47,805.31 U4.16 1380.47,759.53 ccw(c1400,759.53) 1400,740 1425,740 ccw(c1425,745) C20.2
  Bottom Layer w10: v1(670,731.9) 670,587.29 ccw(c733.12,587.29) C12.2 ; 705,490 740,455 ; 705,490 cw(c744.87,529.87) 688.49,529.87 C12.2 ; C13.2 C12.2 ; 740,455 ccw(c777.44,492.44) 777.44,439.49 C16.1 C17.1 ; U5.8 918.69,653.12 cw(c954.23,617.58) 954.23,667.84 1006.42,667.84 ccw(c1006.42,767.84) 1077.13,697.13 v1(1115,735)
  other v1: 1600,735 1625,735 1650,735 1675,735 441.28,755.33 466.28,755.33 1600,760 1625,760 1650,760 1675,760 441.28,780.33 466.28,780.33 1600,785 1625,785 1650,785 1675,785 30,810 55,810 80,810 105,810 130,810 155,810 1600,810 1625,810 1650,810 1675,810 310,815 335,815 360,815 30,835 55,835 80,835 105,835 130,835 155,835 875,835 900,835 1600,835 1625,835 1650,835 1675,835 30,860 55,860 80,860 105,860 130,860 155,860 1600,860 1625,860 1650,860 1675,860 750,875 420,880 55,885 80,885 105,885 130,885 155,885 1600,885 1625,885 1650,885 1675,885 1306.53,893.76 1326.53,893.76 1346.53,893.76 440,895 1600,910 1625,910 1650,910 1326.53,913.76 1346.53,913.76 1366.53,913.76 440,920 790,920 1346.53,933.76 1366.53,933.76 1600,935 1625,935 1650,935 1600,960 1625,960 1650,960 1600,985 1625,985 790,1000 1600,1010 1625,1010 1285.68,1059.66 1220,1080 435,1100 460,1100 560,1100 585,1100 610,1100 635,1100 660,1100 685,1100 710,1100 735,1100 760,1100 435,1125 460,1125 560,1125 585,1125 610,1125 635,1125 660,1125 685,1125 710,1125 735,1125 760,1125 435,1150 460,1150 560,1150 585,1150 610,1150 635,1150 660,1150 685,1150 710,1150 735,1150 760,1150 1080,1150 1105,1150 1130,1150 1155,1150 1180,1150 1205,1150 1230,1150 1255,1150 1280,1150 435,1175 460,1175 560,1175 585,1175 610,1175 635,1175 660,1175 685,1175 710,1175 735,1175 760,1175 1080,1175 1105,1175 1130,1175 1155,1175 1180,1175 1205,1175 1230,1175 1255,1175 1280,1175 435,1200 460,1200 560,1200 585,1200 610,1200 635,1200 660,1200 685,1200 710,1200 735,1200 760,1200 1080,1200 1105,1200 1130,1200 1155,1200 1180,1200 1205,1200 1230,1200 1255,1200 1280,1200 435,1225 460,1225 485,1225 510,1225 535,1225 560,1225 585,1225 610,1225 635,1225 660,1225 685,1225 710,1225 735,1225 760,1225 1080,1225 1105,1225 1130,1225 1155,1225 1180,1225 1205,1225 1230,1225 1255,1225 1280,1225
DRV8323_CAL: R12.1 U2.31 U4.9 | length 914.2
  Top Layer w10: U2.31 824.2,784.88 824.2,785.23 cw(c834.32,795.35) 820,795.35 R12.1 847.93,850 ccw(c847.93,867.07) 860,855 ; 860,855 cw(c872.07,842.93) 872.07,860 v1(985,860) ; v1(1230,770) 1242.16,770 1242.67,770.51 U4.9
  Sign w10: v1(985,860) 1290.79,860 cw(c1290.86,741.36) 1374.75,825.25 1374.8,825.2 v1(1416.17,783.83)
  Bottom Layer w10: v1(1230,770) cw(c1263.39,736.61) 1263.39,783.83 v1(1416.17,783.83)
DRV8323_EN: U2.30 U4.10 | length 892
  Top Layer w8: v1(1205,770) ccw(c1236.03,770) 1236.03,738.97 ccw(c1236.03,758.66) 1252.68,748.15 ccw(c1229.31,771.52) 1262.36,771.52 U4.10
  Top Layer w10: U2.30 895.14,796.07 cw(c965.85,725.36) 965.85,825.36 969.65,825.36 ccw(c969.65,875.35) v1(1005,840)
  Sign w10: v1(1005,840) 1283.91,840 cw(c1283.91,740) 1354.62,810.71 v1(1402.25,763.08)
  Bottom Layer w10: v1(1205,770) ccw(c1231.2,772.07) 1231.14,745.79 ccw(c1231.2,768.93) 1247.59,752.59 1249.97,754.97 cw(c1274.14,730.86) 1274.14,765 1397.61,765 cw(c1397.61,758.44) v1(1402.25,763.08)
DRV8323_HA: U2.34 U4.18 | length 824.6
  Top Layer w10: v1(776.48,748.87) 776.59,748.87 792.72,732.74 U2.34 ; U4.18 1440,825 cw(c1440,815) v1(1450,815)
  Sign w10: v1(776.48,748.87) ccw(c810.35,748.87) 810.35,715 1363.85,715 ccw(c1363.85,801.15) 1450,801.15 v1(1450,815)
DRV8323_HB: U2.36 U4.19 | length 920.7
  Top Layer w10: v1(748.5,721.23) 748.58,721.23 764.91,704.9 U2.36 ; U4.19 1445.31,844.69 cw(c1445.31,815) v1(1475,815)
  Sign w10: v1(748.5,721.23) ccw(c774.73,721.23) 774.73,695 1367.85,695 ccw(c1367.85,802.15) 1475,802.15 v1(1475,815)
DRV8323_HC: U2.38 U4.20 | length 1017.1
  Top Layer w10: v1(720.74,693.55) U2.38@737.15,677.1 ; U4.20 1450.63,864.37 cw(c1450.63,815) v1(1500,815)
  Sign w10: v1(720.74,693.55) ccw(c739.29,693.55) 739.29,675 1373.68,675 ccw(c1373.7,801.96) v1@1500.02,814.63
DRV8323_LA: U2.35 U4.12 | length 703.6
  Top Layer w8: v1(748.66,749.05) U2.35
  Top Layer w10: U4.12 v1@1301.73,749.18 ; v1@1301.73,749.18 cw(c1295.82,749.18) 1300,745 ccw(c1295.82,749.18) 1301.22,746.77 ccw(c1295.82,749.18) v1@1301.73,749.18
  Sign w10: v1(748.66,749.05) 748.66,763.76 cw(c779.91,763.76) 779.91,795 1275,795 cw(c1275,770) 1300,770 v1(1300,745)
  Bottom Layer w6: v1@747.07,749.71 cw(c747.07,747.46) v1(748.66,749.05)
DRV8323_LB: U2.37 U4.13 | length 797.7
  Top Layer w8: v1(720.79,721.21) U2.37
  Top Layer w10: U4.13 1321.41,753.66 ccw(c1333.66,753.66) v1@1325,745
  Sign w10: v1(720.79,721.21) 720.79,755.41 cw(c780.38,755.41) 780.38,815 1280,815 cw(c1280,770) 1325,770 v1(1325,745)
DRV8323_LC: U2.39 U4.2 | length 703
  Top Layer w8: v1(693.13,693.21) U2.39@723.22,663.14
  Top Layer w10: v1(1175,925) 1176.06,923.94 1212.64,923.94 U4.2
  Sign w10: v1(693.13,693.21) 693.13,741.71 cw(c793.13,741.71) 722.42,812.42 802.69,892.69 cw(c878.55,817.03) 878.55,924.17 1174.17,924.17 v1(1175,925)
DRV8323_nF: R7.2 U2.25 U4.11 | length 444
  Top Layer w10: U2.25 950.47,712.21 ccw(c890.04,772.64) R7.2 ; v1@1275,745 ccw(c1258,762) 1282.04,762 U4.11
  Sign w10: v1(960,775) 960.71,774.29 ccw(c1031.42,845) 1031.42,745 1045.86,745 ccw(c1045.86,779.14) 1070,755 ; 1070,755 cw(c1094.14,730.86) 1094.14,765 1120.86,765 cw(c1120.86,730.86) 1145,755 ; 1145,755 ccw(c1169.14,779.14) 1169.14,745 v1(1275,745)
DRV8323_SOA: U2.23 U4.5 | length 316.4
  Top Layer w10: U2.23 1135.43,841.5 cw(c1190.62,786.38) 1190.62,864.38 U4.5
DRV8323_SOB: U2.22 U4.6 | length 301
  Top Layer w10: U2.22 1149.57,827.8 cw(c1190.31,787.13) 1190.31,844.69 U4.6
DRV8323_SOC: U2.21 U4.7 | length 285.5
  Top Layer w10: U2.21 1163.44,813.83 cw(c1190.43,786.84) 1190.43,825.01 U4.7
DVDD: C5.2 C7.2 R7.1 U2.24 U2.27 U2.29 U2.33 | length 538.1
  Top Layer w8: C5.2 cw(c750.92,728.86) 787.73,765.67 U2.33
  Top Layer w10: U2.29 895.99,769.09 cw(c904.99,760.09) 904.99,772.82 cw(c904.99,755.46) v1@917.26,767.74 ; U2.27 924.64,742.07 ccw(c915.24,751.46) 928.54,751.46 ccw(c916.47,751.46) 925,760 v1@917.26,767.74 ; U2.24 1003.21,737.11 ccw(c997.68,742.64) C7.2 cw(c1009.38,746.52) 1003.89,746.52 1003.89,793.96 cw(c1020.96,793.96) 1008.89,806.03 R7.1 972.09,806.72 ccw(c972.09,768.49) 945.05,795.53 v1(923.12,773.59) v1@917.26,767.74
  Sign w10: v1(777,774) 777.2,773.8 922.92,773.8 v1(923.12,773.59)
ENCODER_CLK: U4.26 U5.12 | length 765.4
  Top Layer w8: U4.26 v1(1360.82,1016.68)
  Bottom Layer w8: U5.12 874.27,568.08 ccw(c928.59,622.4) 928.59,545.58 ccw(c928.59,622.8) 983.2,568.2 1135.83,720.83 ccw(c1101.72,755) 1150,754.96 cw(c1198.28,755) 1164.17,789.17 1350,975 ccw(c1323.88,1001.12) 1360.82,1001.12 v1(1360.82,1016.68)
ENCODER_CS: U4.25 U5.5 | length 699.1
  Top Layer w10: U4.25 v1(1380.47,999.75)
  Bottom Layer w8: U5.5 cw(c912.77,652.08) 912.77,707.69 981.26,707.69 ccw(c981.26,807.69) 1051.97,736.97 1345.81,1030.81 cw(c1360.58,1018.12) 1380.05,1018.02 1380.05,1017.92 v1(1380.47,999.75)
ENCODER_MISO: U4.27 U5.7 | length 598.5
  Top Layer w10: U4.27 1341.1,999.3 v1(1341.32,999.3)
  Bottom Layer w8: U5.7 cw(c953.05,611.8) 953.05,685 985.6,685 ccw(c985.6,785) 1056.31,714.29 v1(1341.32,999.3)
ENCODER_MOSI: U4.28 U5.4 | length 673.7
  Top Layer w8: v1(1315,1030) cw(c1315,1023.58) 1321.42,1023.58 U4.28
  Bottom Layer w8: U5.4@834.61,691.28 cw(c920.6,615.17) 920.6,730 974.19,730 ccw(c974.19,833.81) 1046.16,759 1315,1027.84 v1(1315,1030)
FDCAN_RX: U1.4 U4.21 | length 1261.2
  Top Layer w10: U1.4@505.58,787 527,787 ccw(c527,790) v1(530,790) ; U4.21 1459.06,884.06 ccw(c1459.06,920) v1(1495,920)
  Sign w10: v1(530,790) 530,854.15 cw(c650.85,854.15) 650.85,975 1440,975 cw(c1440,920) v1(1495,920)
FDCAN_TX: U1.1 U4.22 | length 1247.4
  Top Layer w10: U1.1@505.58,710.23 505.58,710 v1(535,710) ; U4.22 1453.74,903.74 ccw(c1453.74,920) v1(1470,920)
  Sign w10: v1(535,710) ccw(c535,730) 555,730 555,855 cw(c655,855) 655,955 1435,955 cw(c1435,920) v1(1470,920)
NetC3_1: C3.1 U2.3 | length 63.5
  Top Layer w10: C3.1 ccw(c685,597.67) 718.71,563.96 U2.3
NetC4_1: C4.1 U2.1 | length 97
  Top Layer w10: C4.1 642.9,614.08 cw(c642.9,587.41) 661.66,606.37 ccw(c683.8,628.91) U2.1
NetC4_2: C4.2 U2.2 | length 72.6
  Top Layer w10: C4.2 683.81,580 ccw(c683.81,635.74) U2.2
NetC10_1: C10.1 U6.4 | length 70.1
  Top Layer w10: U6.4 473.63,475.59 474.54,476.5 C10.1@474.54,531.78
NetC10_2: C10.2 L1.1 U6.6
NetC21_2: C21.2 U6.2 | length 80.1
  Top Layer w10: U6.2 499.93,424.41 ccw(c499.93,450) C21.2
NetC22_2: C22.2 L2.2 U4.15 | length 141.3
  Top Layer w10: U4.15 1360.78,769.88 ccw(c1415.38,769.88) 1376.77,731.27 C22.2@1386.25,721.8 ; L2.2 1387.93,680 1387.93,712.99 C22.2 cw(c1395.43,730.98) C22.2@1386.26,721.79
NetD1_G: D1.G U2.6 | length 476.9
  Top Layer w10: v1@690.75,475.75 v1(690,475) 705,475 ccw(c705,494.93) 719.09,480.84 U2.6
  Sign w10: v1(621.61,170.94) cw(c649.65,198.98) 610,198.98 610,413.14 cw(c671.86,413.14) 671.86,475 v1(690,475)
NetD2_G: D2.G U2.8 | length 596.4
  Top Layer w10: v1(690,435) 710,435 ccw(c710,480.71) 742.32,448.39 U2.8
  Sign w10: v1(690,435) 680,435 ccw(c680,405) 650,405 650,227.99 ccw(c729.65,227.99) 673.3,171.7 703.59,141.41 cw(c632.88,70.7) 732.88,70.7 v1(732.88,39.33)
NetD2_S: D2.S R8.2 U2.9 | length 325.8
  Top Layer w10: R8.2 625,325 ccw(c625,345) 645,345 645,375 cw(c685,375) 685,415 696.4,415 ccw(c695.35,515.01) 766.07,444.29 U2.9
  other v1: 730,150 755,150 730,175 755,175
NetD3_G: D3.G U2.15 | length 481.4
  Top Layer w10: U2.15 U2.15 958.59,511.3 cw(c954.28,506.99) v1(960.38,506.99)
  Sign w10: v1(800.24,170.94) 800.24,326.97 cw(c906.27,326.97) 906.27,433 924,433 ccw(c924,469.38) 960.38,469.38 v1(960.38,506.99)
NetD4_G: D4.G U2.13 | length 557.2
  Top Layer w10: U2.13 912.88,501.33 cw(c871.55,460) 930,460 v1(930,390)
  Sign w10: 870,155 889.33,135.67 cw(c836.02,82.23) 911.5,82.22 ; 870,155 cw(c918.28,203.28) 850,203.28 850,332.03 cw(c907.97,332.03) 907.97,390 v1(930,390) ; v1(911.5,39.33) 911.5,82.17
NetD4_S: D4.S R9.2 U2.12 | length 235.4
  Top Layer w10: U2.12 898.43,487.94 cw(c870.49,460) 910,460 cw(c849.64,460) 892.32,417.32 ccw(c958.28,351.36) 865,351.36 865,345 ccw(c885,345) 885,325 R9.2
  other v1: 906,150 931,150 906,175 931,175
NetD5_G: D5.G U2.16 | length 400.8
  Top Layer w10: U2.16 972.47,525.25 cw(c942.22,495) v1(985,495)
  Sign w10: v1(979.17,170.78) ccw(c965.1,184.85) 985,184.85 v1(985,495)
NetD6_G: D6.G U2.18 | length 580.6
  Top Layer w10: U2.18 1001.38,552.01 cw(c944.37,495) 1025,495 v1(1025,465)
  Sign w10: 1025,205.37 ccw(c1127.71,205.36) 1055.13,132.68 1061.88,125.93 cw(c993.15,57.07) 1090.44,57.06 ; 1025,205.42 v1(1025,465) ; v1(1090.44,39.17) 1090.44,57.01
NetD6_S: D6.S R10.2 U2.19 | length 338.3
  Top Layer w10: U2.19 1015.71,565.53 cw(c945,494.82) 1045,494.82 1045,345 cw(c1025,345) 1025,325 R10.2
  other v1: 1086,150 1111,150 1086,175 1111,175
NetLED1_1: LED1.1 R5.2 | length 78.8
  Top Layer w10: LED1.1 cw(c950.95,899.48) 950.95,978 R5.2
NetR11_2: R11.2 U6.3 | length 105.2
  Top Layer w10: U6.3 490,450 ccw(c490,461.23) 501.23,461.23 501.23,480.71 cw(c525.52,480.71) R11.2
NetR13_2: R13.2 U4.4 | length 89.8
  Top Layer w10: R13.2 1129.06,884.06 U4.4
NetR14_2: R14.2 SW1.1 U4.31 | length 593.3
  Top Layer w10: v1(806.76,1086.12) 806.76,1077.24 SW1.1 ; R14.2 1173.2,1044.61 ccw(c1197.81,1044.61) 1197.81,1020 v1(1220,1020) 1225,1020 cw(c1225,982.64) 1262.36,982.64 U4.31
  Bottom Layer w10: v1(806.76,1086.12) 826.35,1086.12 cw(c826.35,1033.64) 863.46,1070.75 ; 865.01,1069.99 ccw(c985.66,1190.6) 985.68,1020 v1(1220,1020)
NetR15_1: R15.1 R17.1 U4.8 | length 369.4
  Top Layer w10: v1(1175,765) 1175,787.93 cw(c1192.07,787.93) 1180,800 ; 1180,800 cw(c1192.84,787.16) 1192.84,805.32 U4.8 ; R15.1 v1(1260,555) R17.1
  Bottom Layer w10: v1(1175,765) 1236.23,703.77 1236.3,703.7 cw(c1179.25,646.55) 1260,646.48 ; v1(1260,555) 1260,646.44
NetR16_1: R16.1 R18.2 R19.2 | length 190.3
  Top Layer w10: R16.1 R18.2 ccw(c396.8,345) 396.8,320 451.8,320 ccw(c451.8,345) R19.2
NetR18_1: R18.1 U6.1 | length 88
  Top Layer w10: R18.1 420,385 cw(c433.82,385) 433.82,398.82 U6.1
NetSW1_2: SW1.2 U4.30 | length 546.8
  Top Layer w10: v1(1235,1040) cw(c1235,1015.86) 1252.07,1032.93 1265,1020 ; 1265,1020 cw(c1223.84,978.84) 1282.05,978.84 U4.30
  Bottom Layer w10: v1(807,1127) 805,1125 cw(c805,1028.43) 873.28,1096.72 887.27,1082.73 ccw(c990.35,1185.69) 990.42,1040 v1(1235,1040)
NetSW1_3: SW1.3 U4.29 | length 592
  Top Layer w10: SW1.3 v1(808.29,1175.71) ; v1(1250,1060) cw(c1250,1047.93) 1258.54,1056.46 1273,1042 cw(c1203.64,972.64) U4.29
  Bottom Layer w10: v1(808.29,1175.71) ccw(c810,1177.41) 810,1175 cw(c810,1126.72) 844.14,1160.86 915.71,1089.29 ccw(c986.42,1160) 916.44,1088.57 ; 916.48,1088.53 ccw(c986.42,1160) 985.35,1060.01 ccw(c986.42,1160) 985.42,1060.01 ccw(c986.42,1160) 986.42,1060 v1(1250,1060)
PGND: C1.1 C2.1 C8.1 C9.1 C14.1 C15.1 C18.1 C19.1 C21.1 C25.1 C26.1 CN1.6 H1.3 H1.4 H1.8 H2.3 H2.4 H2.8 R3.2 R4.2 R8.1 R9.1 R10.1 R17.2 R19.1 U2.10 U2.11 U2.20 U2.40 U2.41 U3.2 U6.5 | length 1090.7
  Top Layer w10: v1(510,320) 517.93,327.93 ccw(c500.86,345) R19.1 525.26,345.26 525.26,401.54 C21.1 ; v1(650,660) 698.53,660 U2.40 U2.40@709.42,649.22 ; R8.1 685,325 cw(c685,345) 665,345 665,375 cw(c685,375) 685,395 703.19,395 ccw(c703.19,495) 773.9,424.29 U2.10 ; U2.41@744.73,629.73 v1(745,630) ; R9.1 825,325 ccw(c825,345) 845,345 845,358.58 cw(c945,358.58) 874.29,429.29 879.39,434.39 ccw(c853.79,460) 890,460 ccw(c869.4,460) 883.97,474.57 U2.11 ; U2.20 1035.71,573.36 cw(c965,502.65) 1065,502.65 1065,345 ccw(c1085,345) 1085,325 R10.1 ; R17.2 v1(1294.9,633.7) 1294.9,611.31 ccw(c1304.9,611.39) v1@1294.99,610.04
  other v1: 480,35 505,35 530,35 555,35 1155,35 1180,35 1205,35 1230,35 480,60 505,60 530,60 555,60 1155,60 1180,60 1205,60 1230,60 480,85 505,85 530,85 555,85 1155,85 1180,85 1205,85 1230,85 480,110 505,110 530,110 555,110 1155,110 1180,110 1205,110 1230,110 160,145 185,145 210,145 135,170 160,170 185,170 210,170 235,170 135,195 160,195 185,195 210,195 235,195 260,195 285,195 360,195 385,195 110,220 135,220 160,220 185,220 210,220 235,220 260,220 285,220 310,220 335,220 360,220 385,220 85,245 110,245 135,245 160,245 185,245 210,245 235,245 260,245 285,245 310,245 335,245 360,245 385,245 85,270 110,270 135,270 160,270 185,270 210,270 235,270 260,270 285,270 310,270 335,270 360,270 385,270 85,295 110,295 135,295 160,295 185,295 210,295 235,295 260,295 285,295 310,295 335,295 360,295 385,295 1450,310 1475,310 1500,310 1525,310 1550,310 1575,310 1600,310 1625,310 1650,310 85,320 110,320 135,320 160,320 185,320 210,320 235,320 260,320 285,320 310,320 335,320 1450,335 1475,335 1500,335 1525,335 1550,335 1575,335 1600,335 1625,335 1650,335 85,345 110,345 135,345 160,345 185,345 210,345 710,350 730,350 750,350 770,350 1450,360 1475,360 1500,360 1525,360 1550,360 1575,360 1600,360 1625,360 1650,360 710,370 730,370 750,370 770,370 1450,385 1475,385 1500,385 1525,385 1550,385 1575,385 1600,385 1625,385 1650,385 1675,385 790,390 810,410 1450,410 1475,410 1500,410 1525,410 1550,410 1575,410 1600,410 1625,410 1650,410 1675,410 1100,415 830,430 1100,435 1120,435 1450,435 1475,435 1500,435 1525,435 1550,435 1575,435 1600,435 1625,435 1650,435 1675,435 1100,455 1120,455 1140,455 1575,460 1600,460 1625,460 1650,460 1675,460 160,465 185,465 1100,475 1120,475 1140,475 1575,485 1600,485 1625,485 1650,485 1675,485 160,490 185,490 1575,510 1600,510 1625,510 1650,510 1675,510 160,515 185,515 30,525 55,525 80,525 855,525 1575,535 1600,535 1625,535 1650,535 1675,535 840,540 870,540 30,550 55,550 80,550 855,555 1575,560 1600,560 1625,560 1650,560 1675,560 30,575 55,575 80,575 1575,585 1600,585 1625,585 1650,585 1675,585 30,600 55,600 80,600 1295,610 1420,610 1550,610 1575,610 1600,610 1625,610 1650,610 1675,610 760,615 945,615 30,625 55,625 80,625 430,625 775,630 930,630 960,630 1420,635 1550,635 1575,635 1600,635 1625,635 1650,635 1675,635 760,645 945,645 30,650 55,650 80,650 430,650 625,660 1550,660 1575,660 1600,660 1625,660 1650,660 1675,660 30,675 55,675 80,675 625,685 650,685
SHA: D1.S D2.D pad.14@650,75 U2.7 | length 460.2
  Top Layer w10: v1(675,455) 705,455 ccw(c705,493.87) 732.49,466.39 U2.7
  Sign w10: v1(647.2,170.94) cw(c688.73,212.47) 630,212.47 630,410 cw(c675,410) v1(675,455)
  other v2: 615,40 650,40 685,40 615,75 650,75 685,75 615,110 650,110 685,110
SHB: D3.S D4.D pad.14@827.5,75 U2.14 | length 461.1
  Top Layer w10: U2.14 931.12,510.92 cw(c890.37,470.17) 948,470.17 948,414.83 ccw(c954.83,414.83) v1(950,410)
  Sign w10: v1(825.82,170.94) 825.82,332.92 cw(c902.91,332.92) 902.91,410 v1(950,410)
  Bottom Layer w10: D3.S@850.47,170.94 D3.S@851.41,170 ; D3.S@876.07,170 D3.S@877.01,170.94
  other v2: 792.5,40 827.5,40 862.5,40 792.5,75 827.5,75 862.5,75 792.5,110 827.5,110 862.5,110
SHC: D5.S D6.D pad.14@1005,75 U2.17 | length 415.2
  Top Layer w10: U2.17 990.46,535.11 cw(c955.35,500) 1005,500 v1(1005,480)
  Sign w10: v1(1004.76,170.78) v1@1004.76,479.76
  other v2: 970,40 1005,40 1040,40 970,75 1005,75 1040,75 970,110 1005,110 1040,110
STATE_LED: R5.1 U4.3 | length 252
  Top Layer w10: R5.1 ccw(c1031.02,992.7) 1031.02,903.75 U4.3
SWCLK: CN1.3 R2.1 U4.24 | length 1793.5
  Top Layer w10: v1(176.1,654.61) 176.35,654.86 256.45,654.86 R2.1 ; v1(225.04,965.04) 255.71,995.71 cw(c326.42,925) 326.42,1025 978.7,1025 ccw(c978.77,1112.48) 1040.63,1050.63 1080.03,1090.03 cw(c1116.18,1053.88) 1116.18,1105 1228.58,1105 cw(c1228.58,1005) 1299.29,1075.71 1314.39,1060.61 ccw(c1352.07,1098.28) 1352.07,1045 1420,1045 cw(c1420,1030) 1435,1030 1435,960 cw(c1418.11,960) 1418.11,943.11 U4.24
  Sign w10: v1(176.1,654.61) ccw(c118.39,712.31) 200,712.31 200,904.59 cw(c285.49,904.59) v1(225.04,965.04)
SWDIO: CN1.4 R1.1 U4.23 | length 1845.8
  Top Layer w10: v1(176.1,703.82) 176.75,704.47 256.06,704.47 R1.1 ; v1(195,975) 235.71,1015.71 cw(c306.42,945) 306.42,1045 980,1045 ccw(c980,1105.35) 1022.68,1062.68 1060.82,1100.82 cw(c1119.14,1042.57) 1119.14,1125 1233.58,1125 cw(c1233.58,1025) 1304.29,1095.71 1322.93,1077.07 ccw(c1352.07,1106.21) 1352.07,1065 1425,1065 cw(c1425,1035) 1455,1035 1455,960 cw(c1418.43,960) 1418.43,923.43 U4.23
  Sign w10: v1(176.1,703.82) 176.1,929.37 cw(c240.63,929.37) v1(195,975)
VBUS: C1.2 C2.2 C3.2 C14.2 C15.2 C25.2 C26.2 D1.D D3.D D5.D H1.1 H1.2 H2.1 H2.2 R11.1 R15.2 U2.4 U2.5 U6.7 | length 80.8
  Top Layer w10: R11.1 564.64,553.2 567.84,550 v1(570,550) ; R15.2 v1(1295,480)
  other v1: 160,395 185,395 210,395 235,395 570,400 160,420 185,420 210,420 235,420 570,425 570,450 570,475 595,475 570,500 595,500 620,500 570,525 595,525 620,525 595,550 620,550
pads on no net: U2.28 U3.4 U5.1 U5.2 U5.3 U5.6 U5.9 U5.10 U5.11 U5.15 U5.16 U5.17 U6.8

## Polygon pours and split planes (outlines as drawn)
DGND on Top Layer "Top Layer-DGND" (solid, remove dead copper, pour order 36): 1180,720 1525,720 1695.46,720 1695.46,869.42 1669.04,960.97 1644.1,1012.02 1618.88,1063.62 1586.98,1110.73 1539.28,1181.16 1482.72,1240.03 1461.15,1250 260.46,1250 233.34,1243.72 209.5,1226.88 170.78,1181.16 107.62,1083.71 82.35,1034.98 55.88,980.84 36.23,924.72 10,856.28 10,720
PGND on Top Layer "Top Layer-PGND" (solid, remove dead copper, pour order 47): 1615,205 1630,235 1644.92,263.92 1654.06,286.12 1675.6,342.27 1689.64,384.05 1695,410 1695,685 1464.08,685 1464.08,525 1085,525 1085,290 1155,290 1155,315 1250,315 1300,265 1300,180 1250,130 1170,130 1145,155 1135,155 1135,15 1475,15 1510,50 1539.25,84.46 1565,120 1590,160
PGND on Top Layer "Top Layer-PGND 1" (solid, remove dead copper, pour order 45): 10,395 18.75,357.82 40,310 60,265 90,200 125,150 175,80 220,35 250,15 580,15 580,190 415,355 120,355 120,691.35 10,691.35 10,425
PGND on Top Layer "PGND_L01_P031" (solid, remove dead copper, pour order 31): 315,885 370,885 370,950 530,950 530,905 480,905 480,875 590,875 610,855 610,640 675,640 675,735 715,775 715,1000 325,1000 315,990
PGND on Top Layer "PGND_L01_P021" (solid, remove dead copper, pour order 21): 397.84,483.37 286.63,483.37 240,530 145,530 145,445 330,445 330,466.58 397.84,466.58
PGND on Top Layer "PGND_L01_P026" (solid, remove dead copper, pour order 26): 685,380 685,255 735,205 875,205 875,285 820,285 820,395 855,430 830,455 755,380
VBUS on Top Layer "VBUS_L01_P020" (solid, remove dead copper, pour order 20): 757,585 783,559 714,490 684,490 625,431 625,375 555,375 555,564 640,564 678,526 698,526
NetD6_S on Top Layer "NETD6_S_L01_P019" (solid, remove dead copper, pour order 19): 955,365 955,260 1075,140 1125,140 1125,200 1025,300 1025,365
NetD4_S on Top Layer "NETD4_S_L01_P018" (solid, remove dead copper, pour order 18): 885,145 895,135 940,135 950,145 950,365 885,365
NetD2_S on Top Layer "NETD2_S_L01_P017" (solid, remove dead copper, pour order 17): 555,365 555,295 650,200 710,140 770,140 770,190 735,190 625,300 625,365
PGND on Top Layer "PGND_L01_P005" (solid, remove dead copper, pour order 5): 375,660 375,615 485,615 485,660
5V on Top Layer "5V_L01_P004" (solid, remove dead copper, pour order 4): 365,490 300,490 300,690 545,690 545,615 495,615 495,670 365,670
NetC10_2 on Top Layer "Top Layer-NetC10_2" (solid, remove dead copper, pour order 3): 340,440 425,440 425,490 445,510 445,555 490,555 490,605 375,605 375,490 405,490 405,460 340,460
VBUS on Top Layer "VBUS_L01_P000" (solid, remove dead copper, pour order 0): 400,435 145,435 145,385 305,385 335,415 400,415
DGND on Bottom Layer "DGND_L04_P039" (solid, remove dead copper, pour order 39): 1695.46,720 1695.46,869.42 1669.04,960.97 1644.1,1012.02 1618.88,1063.62 1586.98,1110.73 1539.28,1181.16 1482.72,1240.03 1461.15,1250 1429.38,1250 1339.54,1250 260.46,1250 233.34,1243.72 209.5,1226.88 170.78,1181.16 107.62,1083.71 82.35,1034.98 55.88,980.84 36.23,924.72 16.86,869.42 15.46,805.35 15.46,720
PGND on Bottom Layer "Bottom Layer-PGND 1" (solid, remove dead copper, pour order 44): 10,395 18.75,357.82 40,310 60,265 90,200 125,150 175,80 220,35 250,15 580,15 580,270 495,355 140,355 140,450 195,450 195,580 660,580 660,691.35 10,691.35 10,425
PGND on Bottom Layer "Bottom Layer-PGND" (solid, remove dead copper, pour order 42): 1615,205 1630,235 1644.92,263.92 1654.06,286.12 1675.6,342.27 1689.64,384.05 1695,410 1695,685 1280,685 1280,580 1555,580 1555,445 1395,445 1301.86,445 1200,343.14 1200,315 1250,315 1300,265 1300,180 1250,130 1170,130 1145,155 1135,155 1135,15 1475,15 1510,50 1539.25,84.46 1565,120 1590,160
PGND on Bottom Layer "PGND_L04_P040" (solid, remove dead copper, pour order 40): 670,380 705,345 1045,345 1260,560 1260,680 1177.5,762.5 960.58,545.58 874.42,545.58 855,565 822.5,532.5 870,485 870,440 820,440 790,410 670,410
VBUS on Bottom Layer "VBUS_L04_P008" (solid, remove dead copper, pour order 8): 205,565 205,440 148.79,440 148.79,370 500,370 595,275 595,200 1115,200 1115,270.75 1304.25,460 1540,460 1540,560 1295,560 1270,535 1250,535 1050,335 700,335 660,375 660,565
SHA on Bottom Layer "SHA_L04_P009" (solid, remove dead copper, pour order 9): 635,190 635,145 620,130 595,130 595,20 710,20 710,190
NetD6_S on Bottom Layer "NETD6_S_L04_P015" (solid, remove dead copper, pour order 15): 1074,190 1074,55 1123,55 1123,190
NetD4_S on Bottom Layer "NETD4_S_L04_P014" (solid, remove dead copper, pour order 14): 894,190 894,55 944,55 944,190
NetD2_S on Bottom Layer "NETD2_S_L04_P012" (solid, remove dead copper, pour order 12): 718,189 718,54 765,54 765,189
SHC on Bottom Layer "SHC_L04_P011" (solid, remove dead copper, pour order 11): 995,190 995,145 980,130 955,130 955,20 1067,20 1067,190
SHB on Bottom Layer "SHB_L04_P010" (solid, remove dead copper, pour order 10): 815,190 815,145 800,130 775,130 775,20 887,20 887,190
DGND on GND "DGND_L02_P030" (solid, remove dead copper, pour order 30): 1695.46,720 1695.46,869.42 1669.04,960.97 1644.1,1012.02 1618.88,1063.62 1586.98,1110.73 1539.28,1181.16 1482.72,1240.03 1461.15,1250 1429.38,1250 1339.54,1250 260.46,1250 233.34,1243.72 209.5,1226.88 170.78,1181.16 107.62,1083.71 82.35,1034.98 55.88,980.84 36.23,924.72 16.86,869.42 15.46,805.35 15.46,720
PGND on GND "PGND_L02_P028" (solid, remove dead copper, pour order 28): 13.84,699.11 13.84,394.69 40.26,303.14 65.2,252.09 90.42,200.5 122.32,153.38 170.02,82.95 226.58,24.08 248.15,14.11 279.92,14.11 369.76,14.11 1448.84,14.11 1475.96,20.39 1499.8,37.23 1538.52,82.95 1601.69,180.4 1626.95,229.13 1653.42,283.27 1673.08,339.39 1692.44,394.69 1693.84,458.76 1693.84,699.11
DGND on Sign "DGND_L03_P029" (solid, remove dead copper, pour order 29): 1695.46,720 1695.46,869.42 1669.04,960.97 1644.1,1012.02 1618.88,1063.62 1586.98,1110.73 1539.28,1181.16 1482.72,1240.03 1461.15,1250 1429.38,1250 1339.54,1250 260.46,1250 233.34,1243.72 209.5,1226.88 170.78,1181.16 107.62,1083.71 82.35,1034.98 55.88,980.84 36.23,924.72 16.86,869.42 15.46,805.35 15.46,720
PGND on Sign "PGND_L03_P025" (solid, remove dead copper, pour order 25): 15,700 15,395.58 41.42,304.03 66.36,252.98 91.58,201.38 123.48,154.27 171.18,83.84 227.74,24.97 249.31,15 281.08,15 370.92,15 1450,15 1477.12,21.28 1500.96,38.12 1539.68,83.84 1602.84,181.29 1628.11,230.02 1654.58,284.16 1674.23,340.28 1693.6,395.58 1695,459.65 1695,700

## Other copper
Top Layer:
  pour cut-out: 1110,1030 1110,989.5 cw(c1109,989.5) 1109,988.5 1180.75,957.58 1230,925 1081.14,731.53 1090,710 1450.63,710 1450.63,1030

## Silkscreen, mask and mechanical layers (free items; w line width, h text height)
Top Overlay:
  text "DIO CLK GND 3V3" at 185.12,1165.03 h70 r243.06
  text "L H G G V V" at 9.48,437.05 h120 r294.17
  text "A" at 630,180 h60
  text "B" at 810,180 h60
  text "C" at 990,180 h60
Bottom Overlay:
  text "ZQ FOC Lite V2.0" at 1230,971.24 h150
  text "2025/08/25" at 1230,860.41 h150
  text "DreamChaser Tech™" at 1230,745.69 h150
  text "V V G G H L" at 1560.56,420.11 h120 r270
Mechanical 1:
  circle w10: c983.84,1156.18 r39.37
  circle w10: c1208.03,222.37 r39.37
  circle w10: c497.73,222.37 r39.37
  circle w10: c317.98,94.02 r49.21
  circle w10: c317.98,1165.82 r49.21
  circle w10: c1389.77,94.02 r49.21
  circle w10: c1389.77,1165.82 r49.21
  lines w2: -0.12,404.65 0.12,404.65
  lines w10: 0.12,404.65 ccw(c78.87,404.65) 3.25,382.67 ccw(c853.88,629.92) 206.79,24.97 ccw(c264.31,78.74) 264.31,0 1443.44,0 ccw(c1443.44,78.74) 1500.96,24.97 ccw(c853.88,629.92) 1704.5,382.67 ccw(c1628.88,404.65) 1707.62,404.65 1707.62,855.2 ccw(c1628.88,855.2) 1704.5,877.17 ccw(c853.88,629.92) 1500.96,1234.88 ccw(c1443.44,1181.1) 1443.44,1259.84 264.31,1259.84 ccw(c264.31,1181.1) 206.79,1234.88 ccw(c853.88,629.92) 3.25,877.17 ccw(c78.87,855.2) 0.12,855.2 0.12,404.65

## Text inside footprints (layer, text, board x,y; h text height)
SW1: Top Overlay "ON" at 607.01,1096.84 h19.68 r180; Top Overlay "ON" at 607.01,1146.84 h19.68 r180; Top Overlay "ON" at 607.01,1196.84 h19.68 r180; Top Overlay "1" at 732.15,1072 h19.68 r270; Top Overlay "2" at 732.15,1122 h19.68 r270; Top Overlay "3" at 732.15,1177 h19.68 r270